# Altium PCB lv_controller-DESKTOP-KLAS9KP.PcbDoc
Units mil, origin at the board's own origin, x right, y up, seen from the top; angles counter-clockwise.
Board outline 3420 x 3310 mil, 2 copper layers (Top Layer, Bottom Layer); 69 components, 57 nets, 278 pads, 12 vias.
Unrouted connection lines stored in the file: 159.
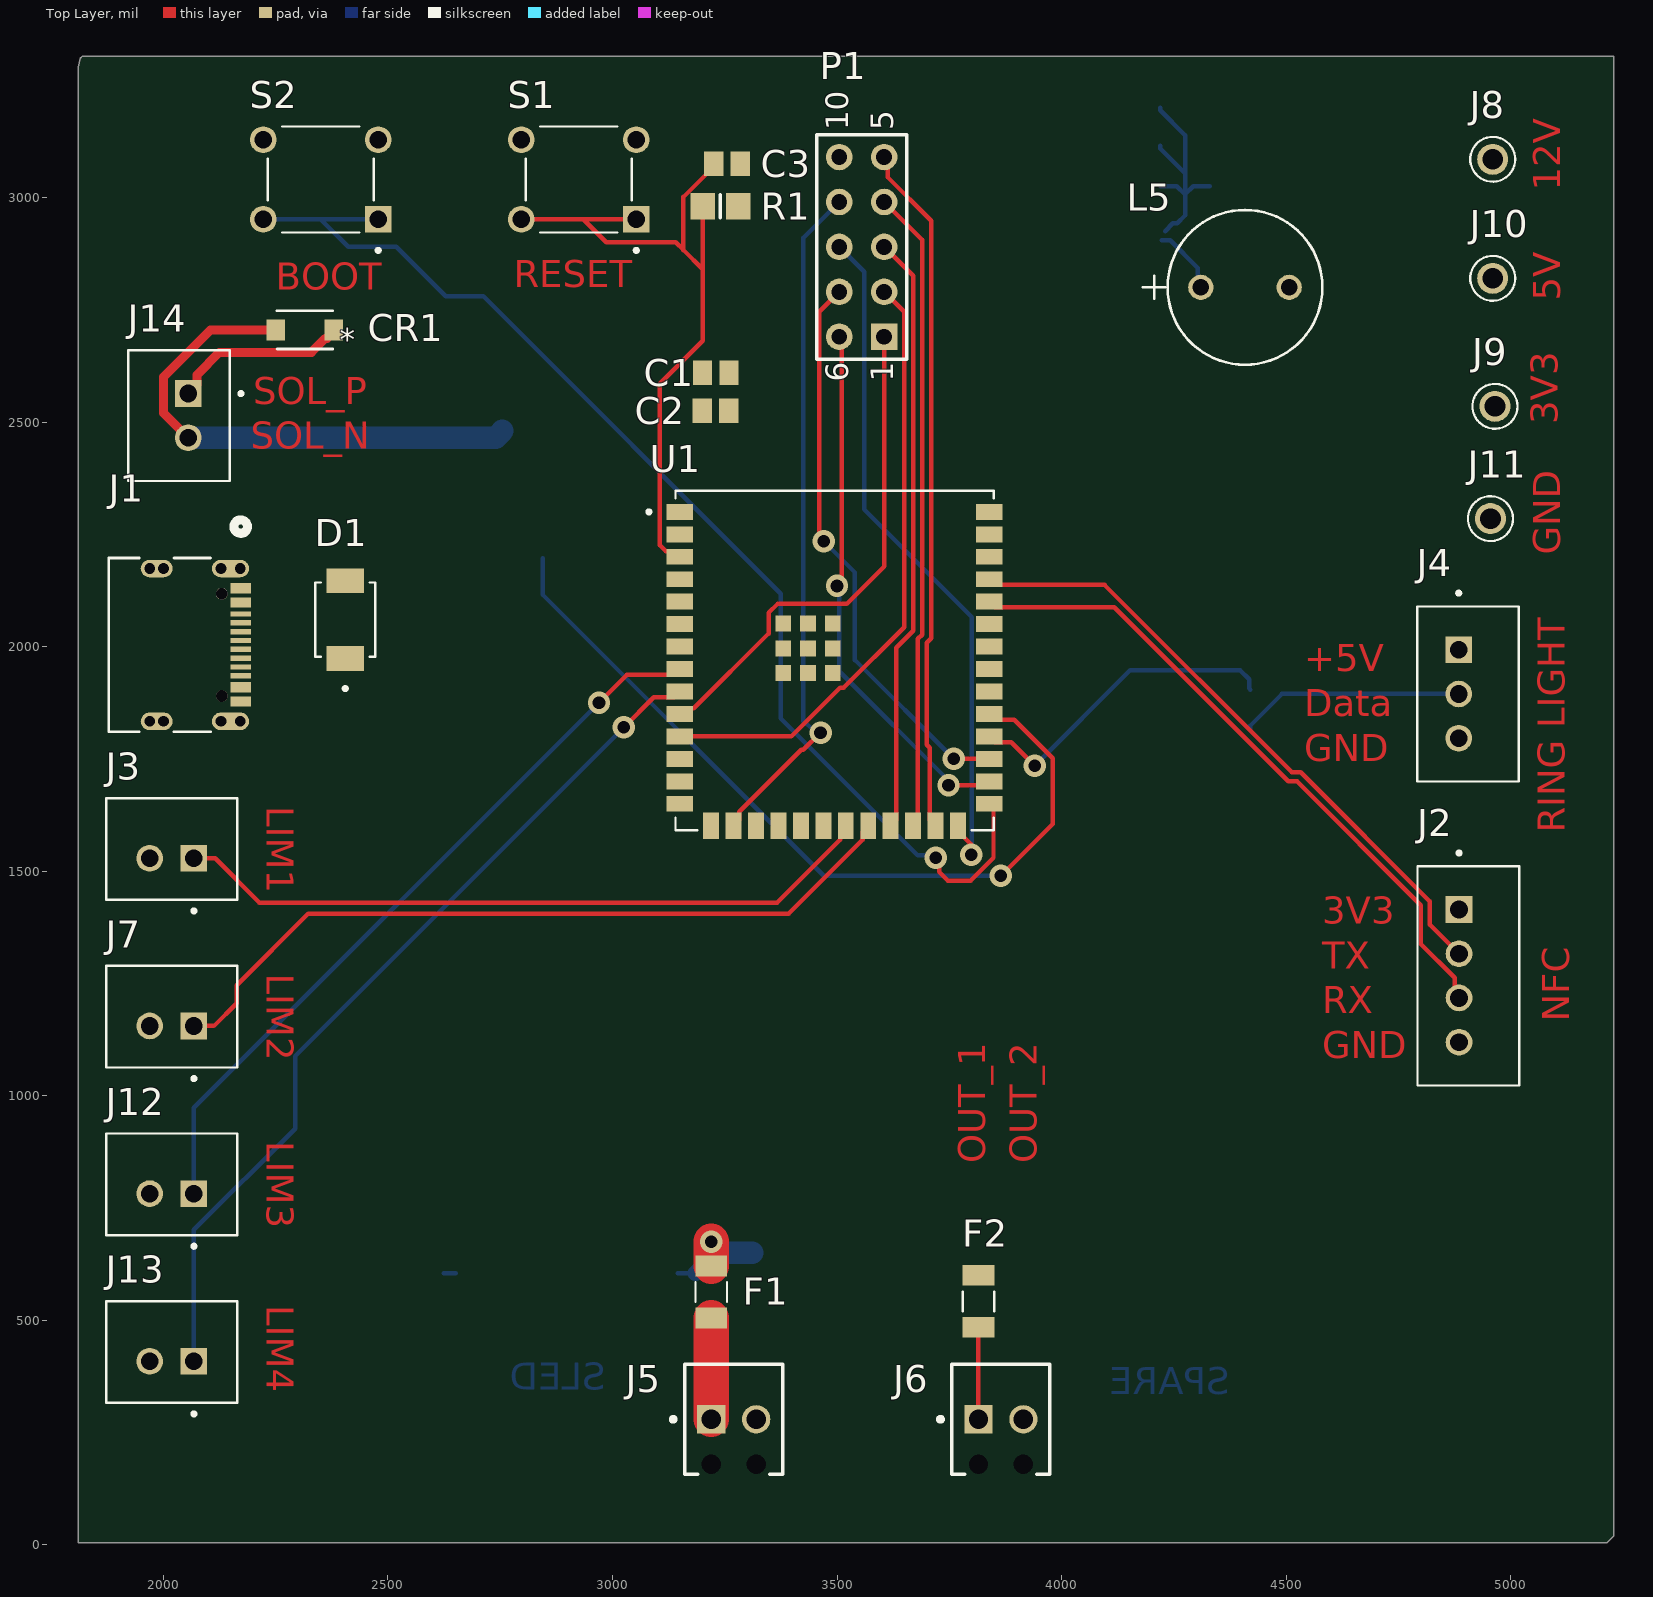
[diagram p0: Top Layer view]
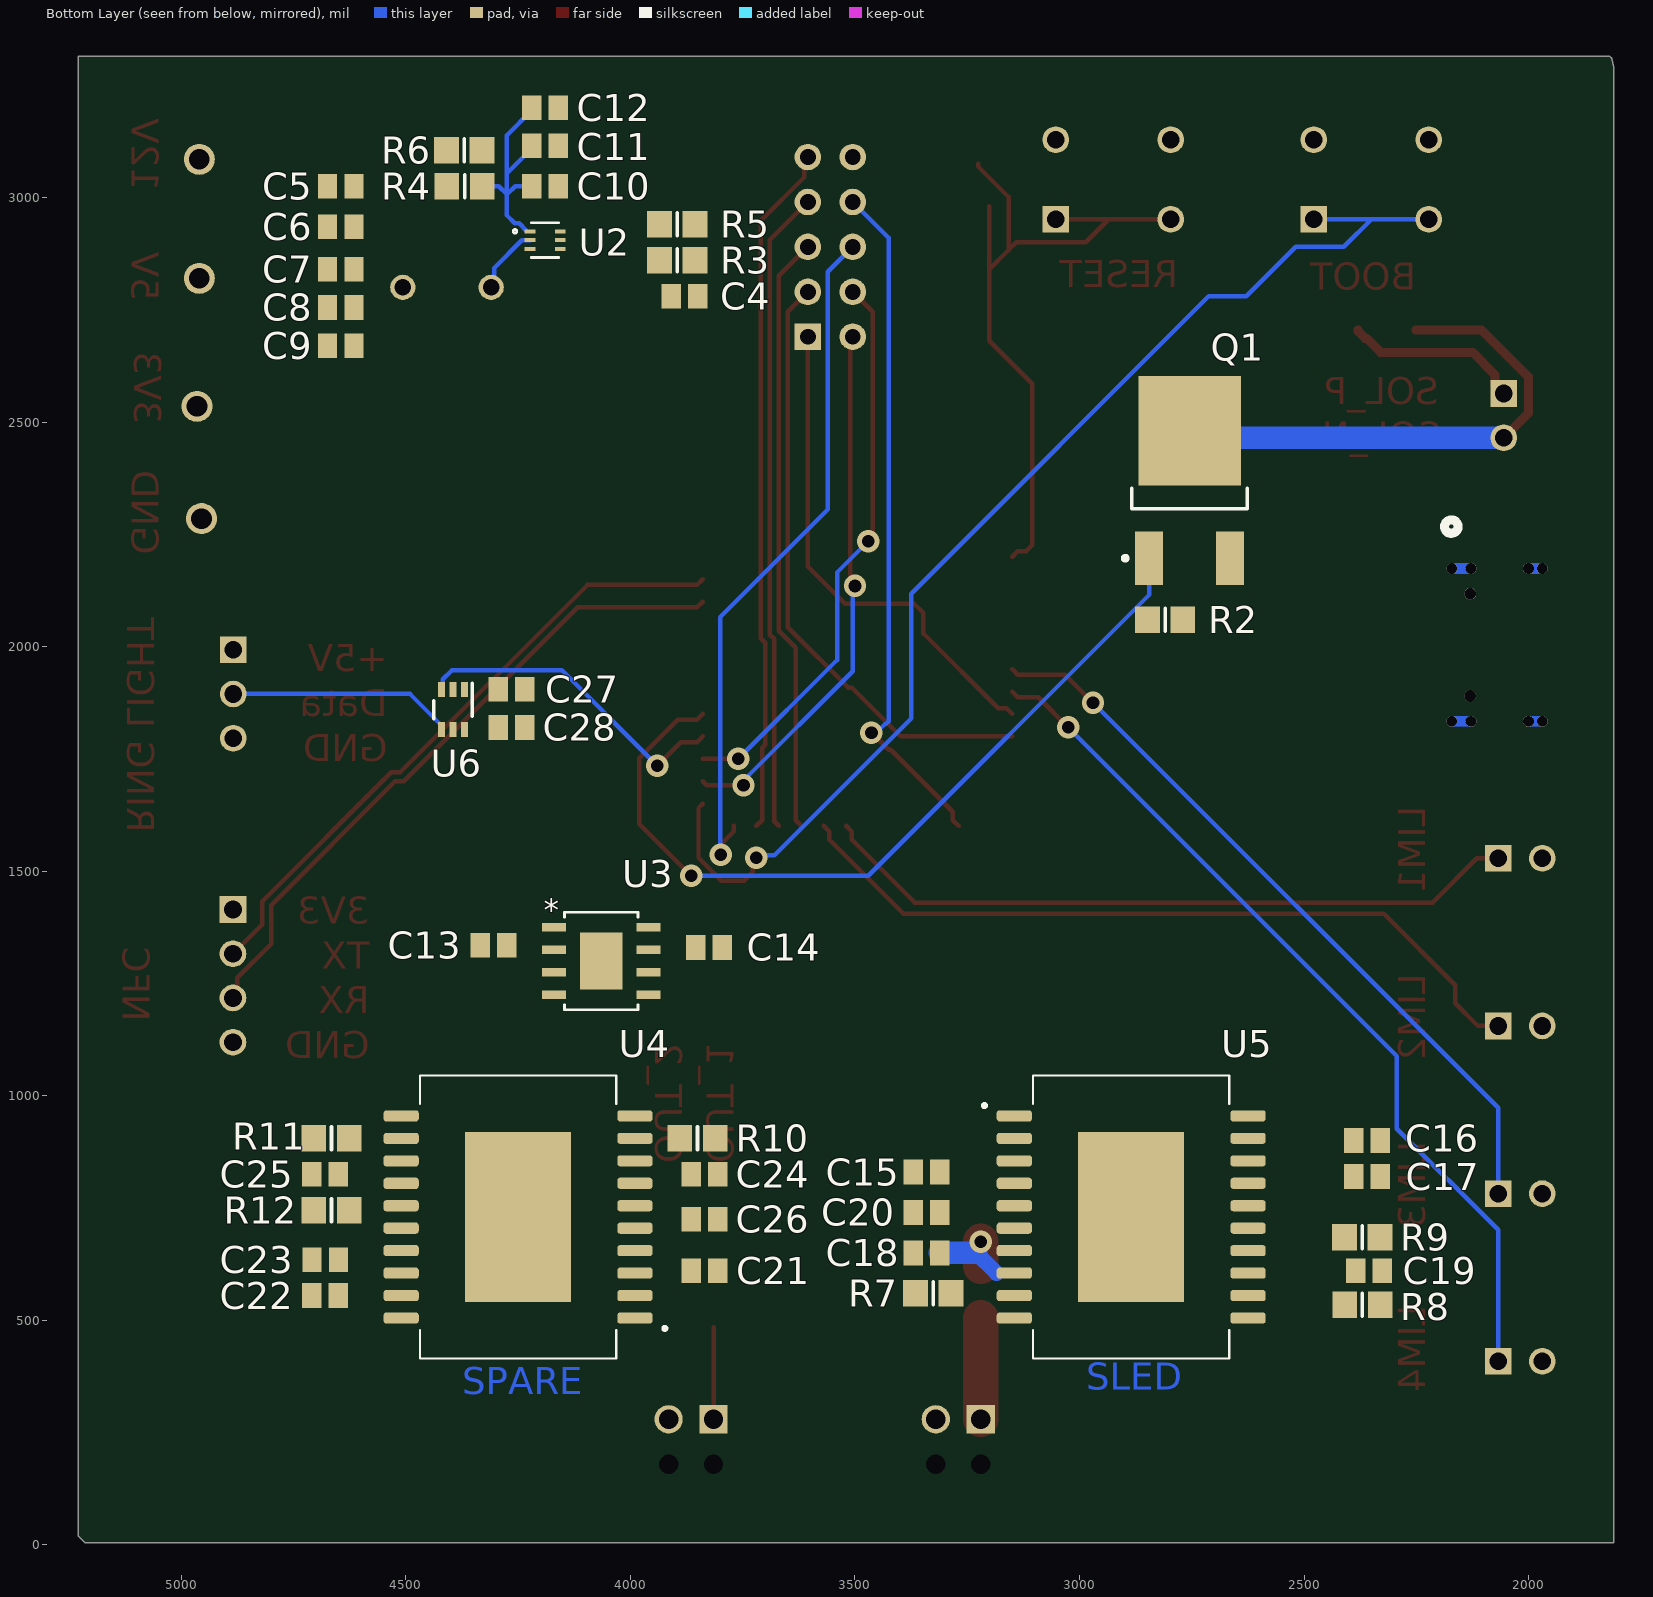
[diagram p1: Bottom Layer view, seen from below]

## Layer stack, top to bottom
Top Solder: solder mask 0.4, Solder Resist, Dk 3.5
Top Layer: signal copper 1.4
Dielectric 1: dielectric 12.6, FR-4, Dk 4.8
Bottom Layer: signal copper 1.4
Bottom Solder: solder mask 0.4, Solder Resist, Dk 3.5

## Board outline
1810,3290 1810,5 5215,5 5230,20 5230,3315 1820,3315 1815,3310

## Design rules (kind name [scope] priority, off if disabled: settings)
Clearance [All] p1: gap=10 ignorepadtopadclearanceinfootprint=FALSE except(0: Arc-Hole Track-Hole SMDPad-Hole THPad-Hole Via-Hole Fill-Hole Poly-Hole Region-Hole Text-Hole)
DiffPairsRouting [All] p1: maxlimit=10 minlimit=10 mostfreqgap=10 toplayer_minwidth=15 toplayer_maxwidth=15 toplayer_prefwidth=15 bottomlayer_minwidth=15 bottomlayer_maxwidth=15 bottomlayer_prefwidth=15 maxuncoupledlength=500
PolygonConnect [All] p1: connectstyle=Relief reliefconductorwidth=10 reliefentries=4 polygonreliefangle="90 Angle" airgapwidth=10
RoutingVias [All] p1: holewidth=28 width=50 viastyle="Through Hole" minholewidth=28 minwidth=50 maxholewidth=28 maxwidth=50
SolderMaskExpansion [All] p1: expansion=4 istentingtop=FALSE
Width Width_1 [All] p1: maxlimit=120 minlimit=10 preferedwidth=20 minimp=50.000000 maximp=50.000000 favimp=50.000000
29 further rules are at their usual default settings.

## Classes and differential pairs
component class lv_controller: C1 C2 C3 C27 C28 CR1 D1 F1 F2 J1 J2 J3 J4 J5 J6 J7 J12 J13 J14 P1 Q1 R1 R2 S1 S2 U1 U6
component class lv_controller_power: C4 C5 C6 C7 C8 C9 C10 C11 C12 C13 C14 J8 J9 J10 J11 L5 R3 R4 R5 R6 U2 U3
component class lv_controller_motor_drivers: C15 C16 C17 C18 C19 C20 C21 C22 C23 C24 C25 C26 R7 R8 R9 R10 R11 R12 U U4
differential pair USB_D: +USB_D_P -USB_D_N

## Components (designator, comment, footprint, x,y, rotation, side; value= is the part's Value field where it differs from the comment)
C1 "Cap" C0805 3230,2610 r0 top value=22uF
C2 "Cap" C0805 3229.53,2525 r0 top value=0.1uF
C3 "Cap" C0805 3255.47,3075 r180 top value=1uF
C4 "Cap" C0805 3879.53,2780 r180 bottom value=33pF
C5 "Cap" C0805 4645,3025 r180 bottom value=22uF
C6 "Cap" C0805 4645,2935 r180 bottom value=22uF
C7 "Cap" C0805 4645,2840 r180 bottom value=22uF
C8 "Cap" C0805 4645,2755 r180 bottom value=22uF
C9 "Cap" C0805 4645,2670 r180 bottom value=100nF
C10 "Cap" C0805 4190,3025 r0 bottom value=10uF
C11 "Cap" C0805 4190,3115 r0 bottom value=10uF
C12 "Cap" C0805 4190,3200 r0 bottom value=100nF
C13 "Cap" C0805 4305,1335 r180 bottom value=1uF
C14 "Cap" C0805 3825,1330 r0 bottom value=1uF
C15 "Cap" C0805 3340.47,830 r180 bottom value=100nF
C16 "Cap" C0805 2359.53,900 r0 bottom value=10uF
C17 "Cap" C0805 2359.53,820 r0 bottom value=100nF
C18 "Cap" C0805 3340.47,650 r180 bottom value=10nF
C19 "Cap" C0805 2355.47,610 r0 bottom value=10nF
C20 "Cap" C0805 3340.47,740 r180 bottom value=100nF
C21 "Cap" C0805 3835,610 r0 bottom value=100nF
C22 "Cap" C0805 4680.47,555 r180 bottom value=10uF
C23 "Cap" C0805 4679.53,635 r180 bottom value=100nF
C24 "Cap" C0805 3835,825 r0 bottom value=10nF
C25 "Cap" C0805 4680.47,825 r180 bottom value=10nF
C26 "Cap" C0805 3835.47,725 r0 bottom value=100nF
C27 "Cap" C0805 4265,1905 r180 bottom value=1uF
C28 "Cap" C0805 4265,1820 r0 bottom value=1uF
CR1 "SS2FH10-M3/H, 100V @ 2A" CR_10-M3/H_VIS 2315,2705 r180 top
D1 "D Schottky" SODFL4725X110N 2405,2060 r90 top
F1 "C1F-8" FUSC3215X83N 3220,562.87 r270 top
F2 "C1F-8" FUSC3215X83N 3815,542.13 r270 top
J1 "USB4105-GF-A" USB4105_GCT 2035.09,2003.78 r270 top
J2 "PN532 NFC NXP RFID Module JST, est. btwn 150-250mA" JST_B4B-XH-A(LF)(SN) 4905.67,1266.89 r270 top
J3 "Limit Switch 1 JST" JST_B2B-XH-A(LF)(SN) 2018.74,1528.64 r0 top
J4 "RGB Ring Light JST, 60mA/LEDx24=1.44 A" JST_B3B-XH-A(LF)(SN) 4905,1894.53 r270 top
J5 "Sled Motor Screw Terminal (16A rated)" PHOE-1725656-2 3270,279.53 r0 top
J6 "Spare Motor Screw Terminal" PHOE-1725656-2 3865,279.53 r0 top
J7 "Limit Switch 2 JST" JST_B2B-XH-A(LF)(SN) 2018.74,1155.31 r0 top
J8 "+12V TP" KEYSTONE_5000 4960,3085 r90 top
J9 "+3.3V TP" KEYSTONE_5000 4965,2535 r90 top
J10 "+5V TP" KEYSTONE_5000 4960,2820 r90 top
J11 "GND TP" KEYSTONE_5000 4955,2285 r90 top
J12 "Limit Switch 3 JST" JST_B2B-XH-A(LF)(SN) 2018.74,781.97 r0 top
J13 "Limit Switch 4 JST" JST_B2B-XH-A(LF)(SN) 2018.74,408.64 r0 top
J14 "Solenoid Bolt Lock JST, 0.4A Nom" JST_B2B-XH-A(LF)(SN) 2055.47,2514.21 r90 top
L5 "RLB0913-2R2K, 2.2uH Inductor, 5.6A" RLB0913-4R7K_BRN 4310,2800 r0 top
P1 "Header 5X2A" HDR2X5_CEN 3605,2690 r90 top
Q1 "NTD14N03RT4G" ONSC-DPAK-3-369C-01_V 2755,2370 r90 bottom
R1 "Res1" 6-0805_M 3240.47,2980 r180 top value=10K
R2 "Res1" 6-0805_M 2809.37,2060 r180 bottom value=10K
R3 "Res1" 6-0805_M 3895.63,2860 r0 bottom value=220K
R4 "Res1" 6-0805_M 4369.37,3025 r0 bottom value=30K
R5 "Res1" 6-0805_M 3895.63,2940 r180 bottom value=30K
R6 "Res1" 6-0805_M 4370,3105 r180 bottom value=10K
R7 "Res1" 6-0805_M 3325.63,560 r180 bottom value=22K
R8 "Res1" 6-0805_M 2370,535 r180 bottom value=22K
R9 "Res1" 6-0805_M 2370.63,685 r180 bottom value=10K
R10 "Res1" 6-0805_M 3850.63,905 r0 bottom value=22K
R11 "Res1" 6-0805_M 4665.63,905 r0 bottom value=22K
R12 "Res1" 6-0805_M 4665.63,745 r0 bottom value=10K
S1 "TS02-66-60-BK-260-LCR-D" SW_TS02-66-60-BK-260-LCR-D 2925,3040 r180 top
S2 "TS02-66-60-BK-260-LCR-D" SW_TS02-66-60-BK-260-LCR-D 2350.47,3040 r180 top
U1 "ESP32-S2-SOLO-U-N4" XCVR_ESP32-S2-SOLO-U-N4R2 3494.49,1968.9 r0 top
U2 "TPS566242DRLR" SOT5x3_DRL_TEX 4190,2905 r180 bottom
U3 "BD33HC5WEFJ-E2" HTSOP-J8_ROM 4065,1300 r180 bottom
U4 "L9958" SOIC127P1420X360-21N 4250.24,730 r0 bottom
U5 "L9958" SOIC127P1420X360-21N 2885,730 r180 bottom
U6 "TXS0101DCKR" DCK0006A_N 4395,1859.76 r270 bottom

## Footprints (in the part's own frame and the unit in brackets; to place one, negate y for a bottom-side part, rotate by r counter-clockwise, add the part's x,y. Pads: shape width x height; smd on the part's side, far side on the other; paste and mask are expansions set on the pad)
6-0805_M [mm] "Chip Resistor, Body 2.0x1.2mm, IPC Low Density"
  rect 1.4x1.5 smd: 1(-1,0) 2(1,0)
  silkscreen extent 0,-0.65 0,0.65, body extent -1.07,-0.7 1.07,0.7, height 0.7
C0805 [mm] "Chip Capacitor, Body 2.0x1.3mm, IPC High Density"
  rect 1.1x1.4 smd: 1(-0.75,0) 2(0.75,0)
  body extent -1.1,-0.72 1.1,0.72, height 1.4
CR_10-M3/H_VIS [mil]
  rect 41x47 smd paste+0 mask+0: 1(-64.5,0) 2(64.5,0)
  silkscreen extent -62,-43 62,43, body extent 0,0 10,10, height 10
DCK0006A_N [mm]
  rect 0.85x0.4 smd paste+0 mask+0.051: 1(-1.125,0.65) 2(-1.125,0) 3(-1.125,-0.65) 4(1.125,-0.65) 5(1.125,0) 6(1.125,0.65)
  silkscreen extent -1.5,-1.09 0.51,1.09, body extent 0,0 0.25,0.25, height 0.25
FUSC3215X83N [mm]
  rect 1.17x1.8 smd: 1(-1.47,0) 2(1.47,0)
  silkscreen extent -0.56,-0.89 0.56,0.89, body extent -1.6,-0.79 1.6,0.79, height 0.83
HDR2X5_CEN [mm] "Connector; Header; 5x2 Position"
  rect 1.5x1.5 hole 0.9: 1(0,0)
  round 1.5 hole 0.9: 2(2.54,0) 3(5.08,0) 4(7.62,0) 5(10.16,0) 6(0,2.54) 7(2.54,2.54) 8(5.08,2.54) 9(7.62,2.54) 10(10.16,2.54)
  silkscreen extent -1.27,-1.27 11.43,3.81
HTSOP-J8_ROM [mil]
  rect 54x19 smd paste+0 mask+0: 1(-105,75) 2(-105,25) 3(-105,-25) 4(-105,-75) 5(105,-75) 6(105,-25) 7(105,25) 8(105,75)
  rect 95x126 smd paste-62.5 mask+0: EPAD(0,0)
  silkscreen extent -82,-109 82,109, body extent -118,-104 118,104, height 39
JST_B2B-XH-A(LF)(SN) [mm]
  rect 1.508x1.508 hole 1: 1(1.25,0)
  round 1.508 hole 1: 2(-1.25,0)
  silkscreen extent -3.7,-3.07 3.7,3.4, body extent -3.7,-2.88 3.7,2.88, height 7
JST_B3B-XH-A(LF)(SN) [mm]
  rect 1.508x1.508 hole 1: 1(-2.5,-0.525)
  round 1.508 hole 1: 2(0,-0.525) 3(2.5,-0.525)
  silkscreen extent -5.8,-2.87 4.95,2.88
JST_B4B-XH-A(LF)(SN) [mm]
  rect 1.508x1.508 hole 1: 1(-3.75,-0.525)
  round 1.508 hole 1: 2(-1.25,-0.525) 3(1.25,-0.525) 4(3.75,-0.525)
  silkscreen extent -7.05,-2.88 6.2,2.87
KEYSTONE_5000 [mm]
  round 1.755 hole 1.17: 1(0,0)
  silkscreen extent -1.27,-1.27 1.27,1.27
ONSC-DPAK-3-369C-01_V [mm] "DPAK, 3-Leads, Body 6.54x6.095mm, Pitch 2.29mm"
  rect 3x1.6 smd: 1(-4.4,2.29) 3(-4.4,-2.29)
  rect 6.2x5.8 smd: 4(2.8,0)
  silkscreen extent -4.52,-3.27 -0.45,3.77, body extent -1.6,-3.27 4.49,3.27, height 2.38
PHOE-1725656-2 [mm] "Connector, 2-Leads, Body 6.2x5.4mm, Pitch 2.54mm"
  rect 1.6x1.6 hole 1.1: 1(-1.27,0)
  round 1.6 hole 1.1: 2(1.27,0)
  round 0 hole 1.1 unplated: MH1(-1.27,-2.54) MH2(1.27,-2.54)
  silkscreen extent -3.54,-3.1 2.77,3.1, body extent -2.77,-3.1 2.77,3.1, height 9
RLB0913-4R7K_BRN [mil]
  round 56 hole 36 mask+0: 1(0,0) 2(196.85,0)
  silkscreen extent -129,-172 271,172, body extent -69,-167 267,167, height 493
SODFL4725X110N [mm]
  rect 1.4x2.1 smd paste-2: 1(-2.2,0) 2(2.2,0)
  silkscreen extent -4,-1.7 2.1,1.7
SOIC127P1420X360-21N [mm]
  rrect50% 1.99x0.63 smd: 1(-6.61,5.715) 2(-6.61,4.445) 3(-6.61,3.175) 4(-6.61,1.905) 5(-6.61,0.635) 6(-6.61,-0.635) 7(-6.61,-1.905) 8(-6.61,-3.175) 9(-6.61,-4.445) 10(-6.61,-5.715) 11(6.61,-5.715) 12(6.61,-4.445) 13(6.61,-3.175) 14(6.61,-1.905) 15(6.61,-0.635) 16(6.61,0.635) 17(6.61,1.905) 18(6.61,3.175) 19(6.61,4.445) 20(6.61,5.715)
  rect 6x9.6 smd paste-6: 21(0,0)
  silkscreen extent -8.4,-8 5.55,8
SOT5x3_DRL_TEX [mil]
  rect 24x9 smd paste+0 mask+0: 1(-33.5,19.69) 2(-33.5,0) 3(-33.5,-19.68) 4(33.5,-19.68) 5(33.5,0) 6(33.5,19.69)
  silkscreen extent -71,-39 31,39, body extent -34,-34 34,34, height 24
SW_TS02-66-60-BK-260-LCR-D [mm]
  rect 1.508x1.508 / inner round 1.508 / far side rect 1.508x1.508 hole 1: 1(-3.25,2.25)
  round 1.508 hole 1: 2(3.25,2.25) 3(-3.25,-2.25) 4(3.25,-2.25)
  silkscreen extent -3.35,-3 3,4.1
USB4105_GCT [mil]
  oval 39x71 smd: 13(-170.08,-49.97) 14(170.08,-49.97)
  oval 39x83 smd: 15(-170.08,114.6) 16(170.08,114.6)
  round 26 hole 26 unplated: 17(-113.78,94.91) 18(113.78,94.91)
  rect 23x45 smd: A1-B12(-125.98,137.24) A4-B9(-94.49,137.24) B1-A12(125.98,137.24) B4-A9(94.49,137.24)
  rect 12x45 smd paste+0 mask+0: A5(-49.21,137.24) A6(-9.84,137.24) A7(9.84,137.24) A8(49.21,137.24) B5(68.9,137.24) B6(29.53,137.24) B7(-29.53,137.24) B8(-68.9,137.24)
  round 24 hole 24 unplated: S_1_H1(-170.08,-34.47) S_1_H2(-170.08,-65.47) S_2_H1(170.08,-34.47) S_2_H2(170.08,-65.47) S_3_H1(-170.08,136.1) S_3_H2(-170.08,93.1) S_4_H1(170.08,136.1) S_4_H2(170.08,93.1)
  Multi-Layer lines w24: 170.08,-65.47 170.08,-34.47 ; -170.08,-65.47 -170.08,-34.47 ; 170.08,93.1 170.08,136.1 ; -170.08,93.1 -170.08,136.1
  silkscreen extent -278,-157 193,152, body extent 0,0 10,10, height 10
XCVR_ESP32-S2-SOLO-U-N4R2 [mm]
  rect 1.5x0.9 smd: 1(-8.75,8.41) 2(-8.75,7.14) 3(-8.75,5.87) 4(-8.75,4.6) 5(-8.75,3.33) 6(-8.75,2.06) 7(-8.75,0.79) 8(-8.75,-0.48) 9(-8.75,-1.75) 10(-8.75,-3.02) 11(-8.75,-4.29) 12(-8.75,-5.56) 13(-8.75,-6.83) 14(-8.75,-8.1) 27(8.75,-8.1) 28(8.75,-6.83) 29(8.75,-5.56) 30(8.75,-4.29) 31(8.75,-3.02) 32(8.75,-1.75) 33(8.75,-0.48) 34(8.75,0.79) 35(8.75,2.06) 36(8.75,3.33) 37(8.75,4.6) 38(8.75,5.87) 39(8.75,7.14) 40(8.75,8.41)
  rect 0.9x1.5 smd: 15(-6.985,-9.35) 16(-5.715,-9.35) 17(-4.445,-9.35) 18(-3.175,-9.35) 19(-1.905,-9.35) 20(-0.635,-9.35) 21(0.635,-9.35) 22(1.905,-9.35) 23(3.175,-9.35) 24(4.445,-9.35) 25(5.715,-9.35) 26(6.985,-9.35)
  rect 0.9x0.9 smd: 41_1(-2.9,2.09) 41_2(-1.5,2.09) 41_3(-0.1,2.09) 41_4(-2.9,0.69) 41_5(-1.5,0.69) 41_6(-0.1,0.69) 41_7(-2.9,-0.71) 41_8(-1.5,-0.71) 41_9(-0.1,-0.71)
  silkscreen extent -10.6,-9.6 9,9.6

## Part data
C1 C2 C3 C4 C5 C6 C7 C8 C9 C10 C11 C12 C13 C14 C15 C16 C17 C18 C19 C20 C21 C22 C23 C24 C25 C26 C27 C28: "Capacitor", LatestRevisionDate=17-Jul-2002, LatestRevisionNote="Re-released for DXP Platform.", PackageDescription="Radial Cap, Thru-Hole; 2 Leads; 0.3 in Pin Spacing", PackageReference=RAD-0.3, Published=8-Jun-2000, Publisher="Altium Limited"
CR1: library part SS2FH10-M3/H, "No Description Available", Mfr_Name=Vishay, Copyright="Copyright (C) 2022 Ultra Librarian. All rights reserved.", Manufacturer_Part_Number=SS2FH10-M3/H, RefDes=RefDes, Type=DEV
D1: "Schottky Diode", Code_JEDEC=DO-214-AA, LatestRevisionDate=17-Jul-2002, LatestRevisionNote="Re-released for DXP Platform.", PackageDescription="DO-214-AA/SMB; 2 C-Bend Leads; Body 5.3 x 3.6 mm, inc. leads (LxW)", PackageReference=SMB, Published=8-Jun-2000, Publisher="Altium Limited"
F1 F2: "C1F 8 (0685F8000-01)", Package="1206 Bel Fuse", Availability=Unavailable, Check_prices=https://www.snapeda.com/parts/C1F-8/Bel%20Fuse/view-part/4620009/?ref=eda, MF="Bel Fuse", MP=C1F-8, Price=None, SnapEDA_Link=https://www.snapeda.com/parts/C1F-8/Bel%20Fuse/view-part/4620009/?ref=snap
J1: "No Description Available", Mfr_Name="Global Connector Technology", Copyright="Copyright (C) 2022 Ultra Librarian. All rights reserved.", Manufacturer_Part_Number=USB4105-GF-A, RefDes=RefDes, Type=DEV
J2: library part B4B-XH-A(LF)(SN), Package=None, Availability=Unavailable, MP=B4B-XH-A(LF)(SN), Price=None
J3 J7 J12 J13 J14: library part B2B-XH-A(LF)(SN), "Connector Header Through Hole 2 position 0.098 (2.50mm)", Package=None, Availability="In Stock", Check_prices=https://www.snapeda.com/parts/B2B-XH-A(LF)(SN)/JST+Sales+America+Inc./view-part/?ref=eda, MF="JST Sales", MP=B2B-XH-A(LF)(SN), Price=None, Purchase-URL=https://pricing.snapeda.com/search/part/B2B-XH-A(LF)(SN)/?ref=eda, SnapEDA_Link=https://www.snapeda.com/parts/B2B-XH-A(LF)(SN)/JST+Sales+America+Inc./view-part/?ref=snap
J4: library part B3B-XH-A(LF)(SN), Package=None, Availability=Unavailable, MP=B3B-XH-A(LF)(SN), Price=None
J5 J6: library part CMP-2000-05299-1, "Male Header, Pitch 2.54 mm, 1 x 2 Position, Height 9 mm, Tail Length 3.5 mm", Colour=Green, Manufacturer="Phoenix Contact", Manufacturer part No.=1725656, Content=250pc(s), Datasheet URL=http://datasheet.octopart.com/1725656-Phoenix-Contact-datasheet-5302866.pdf, Datasheet Version=Apr-08, Industrial packaging=Yes, Manufacturer URL=http://www.phoenixcontact.com/, Number of contacts=2, Pitch=2.54mm, Type=MPT0,5/2-2,54
J8 J9 J10 J11: library part 5000, "High Pin Count, Backplane Connectors, Receptacle, Right Angle, Through Hole, 4 Row, 120 Positions, 0 Guide Pin, 2.54mm (0.100in) Pitch", Package="Custom Package Ohmite", Availability=Good, Check_prices=https://www.snapeda.com/parts/5000/Keystone/view-part/883846/?ref=eda, MF=Keystone, MP=5000, Price=None, Purchase-URL=https://pricing.snapeda.com/search/part/5000/?ref=eda, SnapEDA_Link=https://www.snapeda.com/parts/5000/Keystone/view-part/883846/?ref=snap
L5: library part RLB0913-4R7K, "No Description Available", Mfr_Name="Bourns Electronics", Copyright="Copyright (C) 2022 Ultra Librarian. All rights reserved.", Manufacturer_Part_Number=RLB0913-4R7K, RefDes=RefDes, Type=DEV
P1: "Header, 5-Pin, Dual row", LatestRevisionDate=17-Jul-2002, LatestRevisionNote="Re-released for DXP Platform.", Publisher="Altium Limited"
Q1: library part CMP-1058-00361-1, "Power MOSFET, 14 A, 25 V, N-Channel, 3-Pin DPAK, Pb-Free, Tape and Reel", Manufacturer="On Semiconductor", Package Type=DPAK-3, Channel Polarity="N Channel", Ciss Typ (pF)=115, ComponentLink1Description="Manufacturer URL", ComponentLink1URL=http://www.onsemi.com/, ComponentLink2Description=Datasheet, ComponentLink2URL=http://www.onsemi.cn/pub_link/Collateral/NTD14N03R-D.PDF, ComponentLink3Description="Package Specification", ComponentLink3URL=http://www.onsemi.cn/pub_link/Collateral/369C.PDF, Configuration=Single, Coss Typ (pF)=62, Crss Typ (pF)=33, DatasheetVersion="Rev. 7", Mounting Technology="Surface Mount", PackageDescription="3-Pin Flange Mount, Body 6.54 x 6.095 mm, Pitch 2.29 mm", PackageReference=DPAK-3-369C-01, PackageVersion="Rev. E, 02/2014", Packing="Tape and Reel", PartNumber=NTD14N03RT4G, Qrr Typ (nC)=2, RoHS=Pb-Free, V(BR)DSS Min (V)=25, VGS Max (V)=20, VGS(th) Max (V)=2
R1 R2 R3 R4 R5 R6 R7 R8 R9 R10 R11 R12: "Resistor", LatestRevisionDate=17-Jul-2002, LatestRevisionNote="Re-released for DXP Platform.", PackageDescription="Axial Device, Thru-Hole; 2 Leads; 0.3 in Pin Spacing", PackageReference=AXIAL-0.3, Published=8-Jun-2000, Publisher="Altium Limited"
S1 S2: "6 x 6 mm, 6 mm Actuator Height, 260 gf, Black, Long Crimped, Through Hole, SPST, Tactile Switch", Package=None, Availability="In Stock", Check_prices=https://www.snapeda.com/parts/TS02-66-60-BK-260-LCR-D/CUI+Devices/view-part/?ref=eda, CUI_purchase_URL=https://www.cuidevices.com/product/switches/tactile-switches/ts02-series?utm_source=snapeda.com&utm_medium=referral&utm_campaign=snapedaBOM, MF="CUI Devices", MP=TS02-66-60-BK-260-LCR-D, Price=None, Purchase-URL=https://pricing.snapeda.com/search/part/TS02-66-60-BK-260-LCR-D/?ref=eda, SnapEDA_Link=https://www.snapeda.com/parts/TS02-66-60-BK-260-LCR-D/CUI+Devices/view-part/?ref=snap
U1: library part ESP32-S2-SOLO-U-N4R2, "WiFi 802.11b/g/n Transceiver Module 2.4GHz PCB Trace + IPEX Surface Mount", Package="SMD-40 Espressif Systems", Availability="In Stock", Check_prices=https://www.snapeda.com/parts/ESP32-S2-SOLO-U-N4R2/Espressif+Systems/view-part/?ref=eda, MF="Espressif Systems", MP=ESP32-S2-SOLO-U-N4R2, Price=None, Purchase-URL=https://pricing.snapeda.com/search/part/ESP32-S2-SOLO-U-N4R2/?ref=eda, SnapEDA_Link=https://www.snapeda.com/parts/ESP32-S2-SOLO-U-N4R2/Espressif+Systems/view-part/?ref=snap
U2 U6: "No Description Available", Mfr_Name="Texas Instruments", Copyright="Copyright (C) 2022 Ultra Librarian. All rights reserved.", RefDes=RefDes, Type=DEV
  U2: Manufacturer_Part_Number=TPS566242DRLR
  U6: Manufacturer_Part_Number=TXS0101DCKR
U3: "No Description Available", Mfr_Name="ROHM Semiconductor", Copyright="Copyright (C) 2022 Ultra Librarian. All rights reserved.", Manufacturer_Part_Number=BD33HC5WEFJ-E2, RefDes=RefDes, Type=DEV
U4 U5: "Bipolar Motor Driver CMOS SPI PowerSO-16â„¢", Package="SO-20 STMicroelectronics", Availability=Unavailable, MF=STMicroelectronics, MP=L9958, Price=None, SnapEDA_Link=https://www.snapeda.com/parts/L9958/STMicroelectronics/view-part/213961/?ref=snap

## Via types
v1: diameter 50, hole 28, Top Layer to Bottom Layer, 12 vias

## Nets (pads, with @x,y where several pads share a name; then routed paths per layer and width w, separated by ;. In a path a pad name is that pad's centre, name@x,y a point inside that pad or via, vN(x,y) a via of type N, cw(c..) or ccw(c..) an arc to the next point about the centre after c; other vN are vias at no path point)
+3V3: C1.2 C2.2 C13.2 C15.2 C21.2 C27.1 J2.1 J9.1 R1.1 R7.1 R10.1 U1.2 U3.1 U3.2 U4.3 U5.3 U6.1 U6.5
+5: C4.2 C5.2 C6.2 C7.2 C8.2 C9.2 C14.2 C16.2 C17.2 C22.2 C23.2 C28.2 D1.2 J4.1 J10.1 L5.2 R3.1 U3.5 U3.8 U4.18 U5.18 U6.6
GND: C1.1 C2.1 C3.1 C5.1 C6.1 C7.1 C8.1 C9.1 C10.1 C11.1 C12.1 C13.1 C14.1 C15.1 C16.1 C17.1 C18.1 C19.1 C21.1 C22.1 C23.1 C24.1 C25.1 C27.2 C28.1 J1.A1-B12 J1.B1-A12 J2.4 J3.2 J4.3 J7.2 J11.1 J12.2 J13.2 Q1.3 R2.2 R5.2 R6.2 R8.2 R9.2 R11.2 R12.2 S1.3 S1.4 S2.3 S2.4 U1.1 U1.40 U1.41_1 U1.41_2 U1.41_3 U1.41_4 U1.41_5 U1.41_6 U1.41_7 U1.41_8 U1.41_9 U2.3 U2.4 U3.3 U3.EPAD U4.1 U4.10 U4.11 U4.19 U4.20 U4.21 U5.1 U5.10 U5.11 U5.19 U5.20 U5.21 U6.2
GPIO17: P1.1 U1.10 | length 1129.5
  Top Layer w10: U1.10 3162.72,1862.72 3181.17,1862.72 3347.6,2029.14 3347.6,2075.11 3367.49,2095 3521.57,2095 3605,2178.43 P1.1
GPIO18: P1.2 U1.11 | length 1365.5
  Top Layer w10: U1.11 3398.43,1800 3506.66,1908.23 3514.48,1908.23 3649.53,2043.27 3649.53,2745.47 P1.2
GPIO21: P1.3 U1.23 | length 1336.7
  Top Layer w10: P1.3 3669.53,2825.47 3669.53,2034.99 3632.2,1997.67 3632.2,1613.5 U1.23
GPIO33: P1.4 U1.24 | length 1432.5
  Top Layer w10: P1.4 3689.53,2905.47 3689.53,2026.7 3680,2017.18 3680,1611.3 U1.24
GPIO34: P1.5 U1.25 | length 1544.5
  Top Layer w10: P1.5 3612.5,3082.5 3612.5,3045.47 3709.53,2948.44 3709.53,2018.42 3700,2008.89 3700,1781.72 3706.77,1774.94 3706.77,1613.5 U1.25
GPIO35: P1.6 U1.28 | length 1202.3
  Top Layer w10: v1(3500,2135) 3500,2145.82 3510,2155.82 3510,2685 P1.6 ; v1(3748.23,1691.17) 3830.14,1691.17 U1.28
  Bottom Layer w10: v1(3500,2135) 3505,2130 3505,1945 3748.23,1701.77 v1(3748.23,1691.17)
GPIO36: P1.7 U1.29 | length 1261.5
  Top Layer w10: v1(3470,2235) 3470,2245.82 3460.47,2255.35 3460.47,2745.47 P1.7 ; v1(3760,1750) U1.29
  Bottom Layer w10: v1(3470,2235) 3540,2165 3540,1970 v1(3760,1750)
GPIO45: P1.8 U1.26 | length 1552.5
  Top Layer w10: U1.26 3769.49,1588.98 3797.35,1561.12 3797.35,1537.65 v1(3798.43,1536.57)
  Bottom Layer w10: P1.8 3560.47,2834.53 3560.47,2305.39 3800,2065.86 3800,1538.14 v1(3798.43,1536.57)
GPIO46: P1.9 U1.16 | length 1528.8
  Top Layer w10: U1.16 3282.2,1613.5 3282.2,1631.96 3420.24,1770 3425,1770 v1(3463.28,1808.28)
  Bottom Layer w10: v1(3463.28,1808.28) 3452.46,1808.28 3434.18,1826.57 3432.07,1826.57 3425,1833.64 3425,2910 P1.9
HSU_RX: J2.3 U1.36 | length 1482.7
  Top Layer w10: U1.36 3851.69,2087.28 4117.49,2087.28 4504.77,1700 4524.22,1700 4800,1424.22 4800,1337.91 4875.55,1262.35 4875.55,1227.12 J2.3
HSU_TX: J2.2 U1.37 | length 1421.5
  Top Layer w10: U1.37 3851.69,2137.28 4095.77,2137.28 4513.06,1720 4532.5,1720 4820,1432.5 4820,1381.1 J2.2
LIM_SW_1: J3.1 U1.21 | length 1573.9
  Top Layer w10: J3.1 2115.21,1528.64 2213.79,1430.06 3367.22,1430.06 3506.77,1569.61 3506.77,1588.07 U1.21
LIM_SW_2: J7.1 U1.22 | length 1720.4
  Top Layer w10: J7.1 2112.64,1155.31 2163.21,1205.88 2163.21,1246.09 2322.69,1405.57 3392.73,1405.57 3556.77,1569.61 3556.77,1588.07 U1.22
LIM_SW_3: J12.1 U1.8 | length 1677.7
  Top Layer w10: v1(2970,1875) 3032.28,1937.28 3137.28,1937.28 U1.8
  Bottom Layer w10: J12.1 2067.95,972.95 v1(2970,1875)
LIM_SW_4: J13.1 U1.9 | length 1965.9
  Top Layer w10: v1(3025,1820) 3092.28,1887.28 3137.28,1887.28 U1.9
  Bottom Layer w10: J13.1 2067.95,701.39 2293.35,926.79 2293.35,1088.35 v1(3025,1820)
MCU_BOOT: S2.1 S2.2 U1.27 | length 2664.7
  Top Layer w10: v1(3720,1530) 3727.65,1522.35 3727.65,1498.17 3746.64,1479.18 3797.61,1479.18 3848.43,1530 3848.43,1640.55 U1.27
  Bottom Layer w10: S2.2 2350,2951.42 ; S2.1@2457.21,2951.42 2350,2951.42 ; v1(3720,1530) 3715,1535 3680,1535 3375,1840 3375,2117.67 2712.71,2779.96 2628.67,2779.96 2518.63,2890 2411.42,2890 2350,2951.42
MCU_EN: C3.2 R1.2 S1.1 S1.2 U1.3 | length 1637.1
  Top Layer w10: S1.2 2935,2951.42 ; S1.1 2935,2951.42 ; U1.3 3137.28,2212.72 3118.83,2212.72 3105.47,2226.07 3105.47,2585.43 3201.1,2681.06 3201.1,2840 ; R1.2 3201.1,2840 ; C3.2 3225.94,3069.09 3158.05,3001.2 3158.05,2883.05 ; 2935,2951.42 2986.42,2900 3141.1,2900 3158.05,2883.05 ; 3158.05,2883.05 3201.1,2840
NetC4_1: C4.1 R3.2 R5.1 U2.6
NetC18_2: C18.2 F1.1 U5.8 | length 265.7
  Top Layer w80: F1.1 v1(3220,675)
  Bottom Layer w10: U5.8 3185,605 ; 3215,650 3215,670 v1(3220,675)
  Bottom Layer w35: 3185,605 3230,650
  Bottom Layer w50: 3230,650 C18.2
NetC19_2: C19.2 J5.2 U5.13 | length 26.8
  Bottom Layer w10: U5.13 U5.13@2651.54,605
NetC20_2: C20.2 U5.5
NetC24_2: C24.2 F2.1 U4.8
NetC25_2: C25.2 J6.2 U4.13
NetC26_2: C26.2 U4.5
NetF1_2: F1.2 J5.1 | length 225.5
  Top Layer w80: J5.1 F1.2
NetF2_2: F2.2 J6.1 | length 204.7
  Top Layer w10: J6.1 F2.2
NetL5_1: L5.1 U2.2 | length 151.4
  Bottom Layer w10: U2.2 4223.68,2904.82 4241.71,2904.82 4303.53,2843 4303.53,2806.47 L5.1
NetR4_2: R4.2 R6.1 U2.5
NetR7_2: R7.2 U1.38 U5.9
NetR8_1: R8.1 U1.39 U5.12
NetR9_1: R9.1 U5.15
NetR10_2: R10.2 U1.33 U4.9
NetR11_1: R11.1 U1.32 U4.12
NetR12_1: R12.1 U4.15
NetU1_4: U1.4 U5.7
NetU1_5: U1.5 U5.4
NetU1_6: U1.6 U5.17
NetU1_7: U1.7 U5.16
NetU1_12: U1.12 U5.2
NetU1_15: U1.15 U5.14
NetU1_17: U1.17 U4.4
NetU1_18: U1.18 U4.17
NetU1_19: U1.19 U4.16
NetU1_20: U1.20 U4.2
NetU1_34: U1.34 U4.14
NetU1_35: U1.35 U4.7
RING_LIGHT_DI_3V3: U1.30 U6.3 | length 726.5
  Top Layer w10: U1.30 3851.69,1787.28 3887.72,1787.28 v1(3940,1735)
  Bottom Layer w10: v1(3940,1735) 4152.56,1947.56 4397.32,1947.56 4417.87,1927 4417.87,1906.77 U6.3
RING_LIGHT_DI_5V: J4.2 U6.4 | length 501.7
  Bottom Layer w10: U6.4 4420.59,1824.33 4490.79,1894.53 J4.2
SOLENOID_N: CR1.2 J14.2 Q1.4 | length 1157.8
  Top Layer w20: J14.2 2000,2520.47 2000,2600 2105,2705 CR1.2
  Bottom Layer w50: J14.2 2739.76,2465 Q1.4
SOLENOID_P: C10.2 C11.2 C12.2 C20.1 C26.1 CR1.1 J8.1 J14.1 R4.1 U2.1 U4.6 U5.6 | length 929.1
  Top Layer w20: J14.1 2075.16,2583.11 2075.16,2605.16 2125,2655 2329.5,2655 2361,2686.5 2364,2686.5 2379.5,2702 CR1.1
  Bottom Layer w10: C10.2 4256.81,3025 4275,3006.81 ; C11.2 4219.53,3109.09 4275,3053.62 ; C12.2 4219.53,3194.09 4275,3138.62 4275,3053.62 ; U2.1@4230.5,2925.19 4247.91,2942.59 4257.59,2942.59 4275,2960 4275,3006.81 ; R4.1 4293.19,3025 4275,3006.81 ; 4275,3006.81 4275,3053.62
SOLENOID_UNLOCK_HIGH: Q1.1 R2.1 U1.31 | length 1851.5
  Top Layer w10: U1.31 3851.69,1837.28 3894.29,1837.28 3980,1751.57 3980,1605 v1(3865,1490)
  Bottom Layer w10: Q1.1 2845.16,2115 3470.16,1490 v1(3865,1490)
USB_D_N: J1.A7 J1.B7 U1.13
USB_D_P: J1.A6 J1.B6 U1.14
VBUS: D1.1 J1.A4-B9 J1.B4-A9
pads on no net: J1.13 J1.14 J1.15 J1.16 J1.17 J1.18 J1.A5 J1.A8 J1.B5 J1.B8 J1.S_1_H1 J1.S_1_H2 J1.S_2_H1 J1.S_2_H2 J1.S_3_H1 J1.S_3_H2 J1.S_4_H1 J1.S_4_H2 J5.MH1 J5.MH2 J6.MH1 J6.MH2 P1.10 U3.4 U3.6 U3.7

## Other copper
Top Layer:
  text "12V" at 5110,3015 h60 r90
  text "RESET" at 2780,2800 h60
  text "BOOT" at 2250,2795 h60
  text "5V" at 5110,2770 h60 r90
  text "SOL_P" at 2200,2540 h60
  text "3V3" at 5105,2495 h60 r90
  text "SOL_N" at 2195,2440 h60
  text "GND" at 5110,2205 h60 r90
  text "+5V" at 4540,1945 h60
  text "Data" at 4540,1845 h60
  text "GND" at 4540,1745 h60
  text "LIM1" at 2230,1645 h60 r270
  text "RING LIGHT" at 5120,1585 h60 r90
  text "3V3" at 4580,1383.08 h60
  text "TX" at 4580,1283.08 h60
  text "LIM2" at 2230,1271.67 h60 r270
  text "RX" at 4580,1183.08 h60
  text "NFC" at 5130,1165 h60 r90
  text "GND" at 4580,1083.08 h60
  text "LIM3" at 2230,898.33 h60 r270
  text "OUT_1" at 3830,850 h60 r90
  text "OUT_2" at 3945,850 h60 r90
  text "LIM4" at 2230,533.33 h60 r270
Bottom Layer:
  text "SLED" at 2985,345 h60
  text "SPARE" at 4375,335 h60

## Text inside footprints (layer, text, board x,y; h text height)
CR1: Top Overlay "*" at 2427.5,2730 h50 r180; Mechanical 13 "*" at 2374.5,2730 h50 r180
P1: Top Overlay "6" at 3525,2590 h50 r90; Top Overlay "10" at 3525,3150 h50 r90; Top Overlay "5" at 3625,3150 h50 r90; Top Overlay "1" at 3625,2590 h50 r90
U3: Mechanical 13 "*" at 4139.5,1350.5 h50; Bottom Overlay "*" at 4192.5,1389 h50